# Altium PCB Soket_Board_PCB.PcbDoc
Units mm, origin at the board's own origin, x right, y up, seen from the top; angles counter-clockwise.
Board outline 118.49 x 86.99 mm, 2 copper layers (Top Layer, Bottom Layer), stack 1.569 mm thick; 15 components, 35 nets, 100 pads, 7 vias.
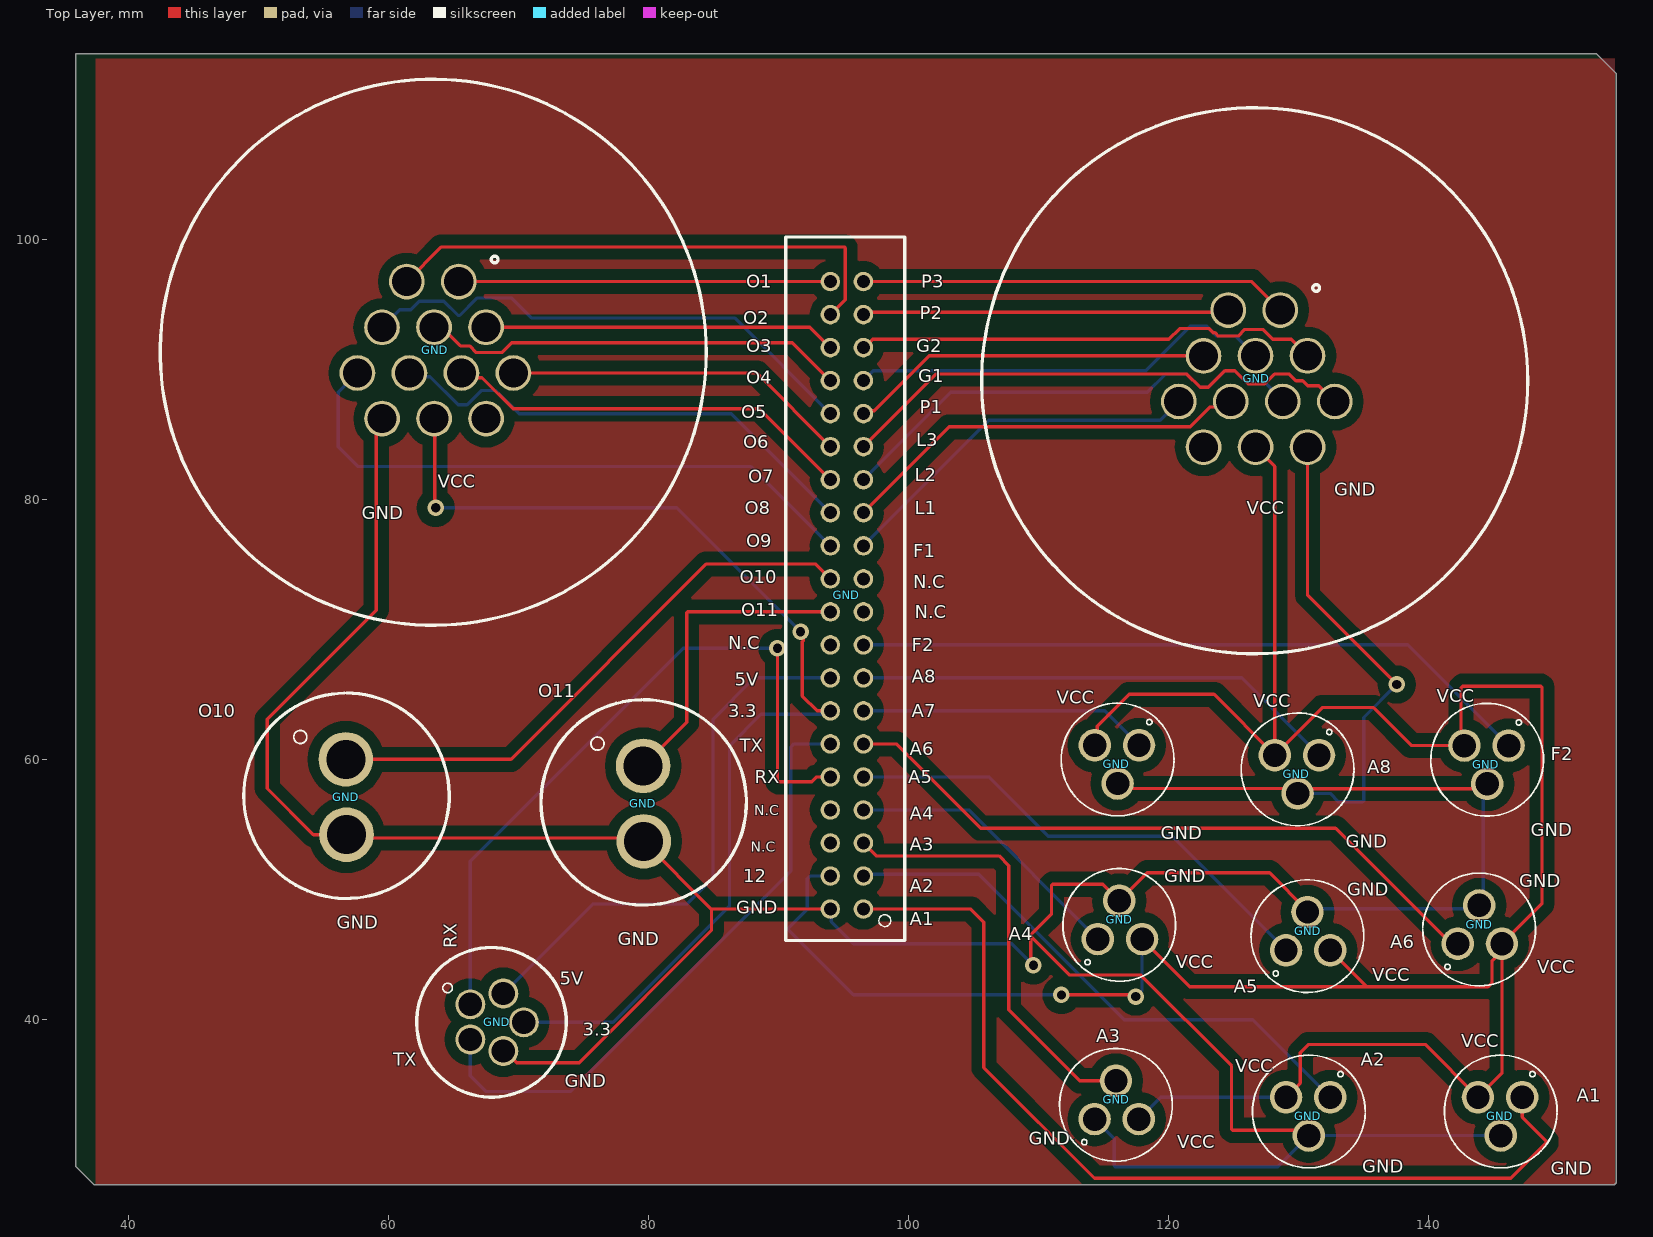
[diagram p0: Top Layer view]
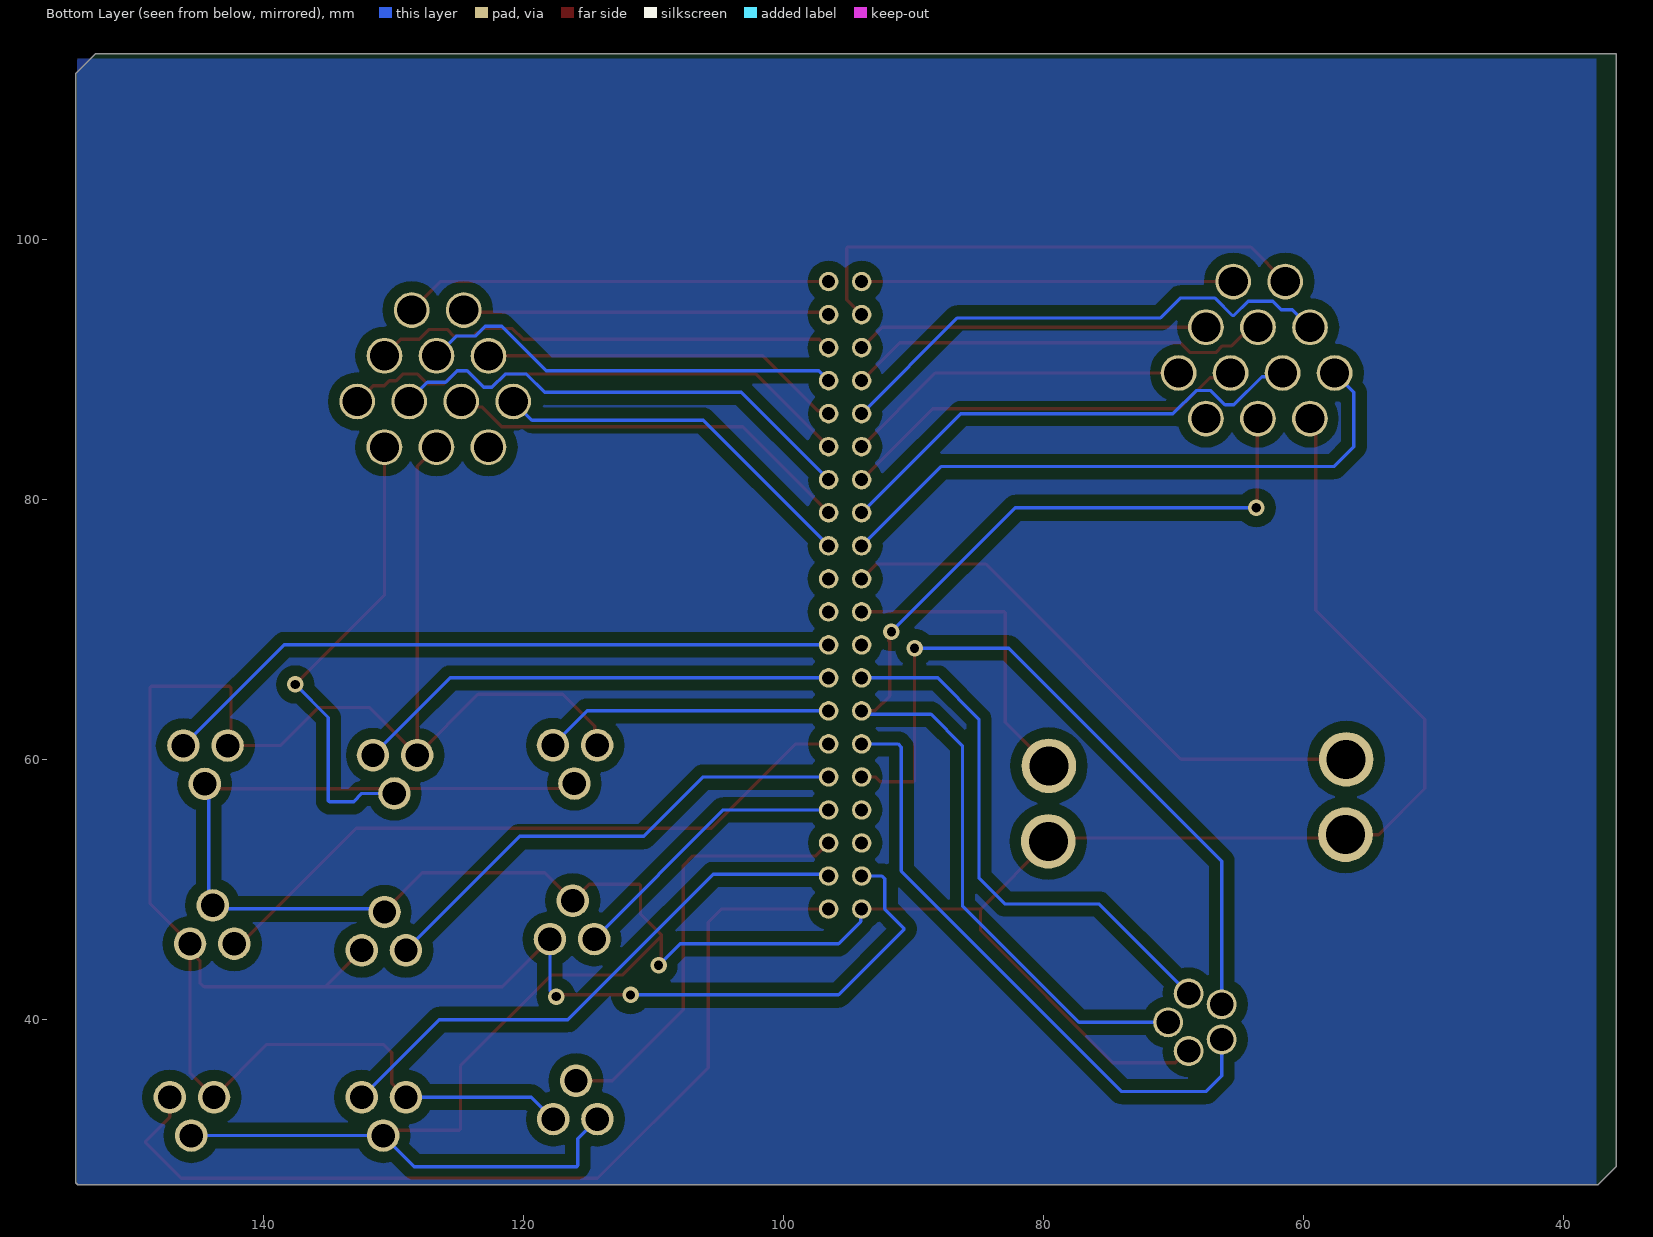
[diagram p1: Bottom Layer view, seen from below]

## Layer stack, top to bottom
Top Solder: solder mask 0.0254, SM-001, Dk 4
Top Layer: signal copper 0.035
Dielectric 1: core 1.4986, Core-043, Dk 4.3
Bottom Layer: signal copper 0.035
Bottom Solder: solder mask 0.0254, SM-001, Dk 4

## Board outline
35.941,28.702 37.338,27.305 154.283,27.305 154.432,27.454 154.432,112.776 152.908,114.3 35.941,114.3

## Design rules (kind name [scope] priority, off if disabled: settings)
Clearance [InPolygon] p1: gap=0.85 ignorepadtopadclearanceinfootprint=FALSE
PlaneClearance [All] p1: clearance=0.5
PlaneConnect [All] p1: planeconnectstyle=Relief reliefexpansion=0.908 reliefentries=4 reliefconductorwidth=0.554 reliefairgap=0.554
PolygonConnect [All] p1: connectstyle=Relief reliefconductorwidth=0.854 reliefentries=4 polygonreliefangle="90 Angle" airgapwidth=0.854
RoutingVias [All] p1: holewidth=0.711 width=1.27 viastyle="Through Hole" minholewidth=0.711 minwidth=1.27 maxholewidth=0.711 maxwidth=1.27
SolderMaskExpansion [All] p1: expansion=0.102 istentingtop=FALSE
Width [All] p1: maxlimit=0.654 minlimit=0.054 preferedwidth=0.14
28 further rules are at their usual default settings.

## Classes and differential pairs
component class Sheet2: *2 *3 *5 *7 *11 *12 *13 gnd

## Components (designator, comment, footprint, x,y, rotation, side; value= is the part's Value field where it differs from the comment)
GND "GND" PCBComponent_1 66.294,38.481 r90 top (schematic designator *15)
GND "GND" "circular canector 2 pin big" 56.769,54.229 r90 top (schematic designator *14)
GND "GND" "circular canector 2 pin big" 79.629,53.721 r90 top (schematic designator *13)
GND "GND" "BOX HEADER 2X20" 96.52,96.774 r270 top (schematic designator *12)
GND "GND" "calculator connector 12 pin big" 57.605,89.744 r0 top (schematic designator *11)
GND "GND" "calculator connector 12 pin big" 120.787,87.549 r0 top (schematic designator *10)
GND "GND" "circular connector 3 pin small" 143.793,34.036 r0 top (schematic designator *9)
GND "GND" "circular connector 3 pin small" 129.032,34.036 r0 top (schematic designator *8)
GND "GND" "circular connector 3 pin small" 117.704,32.36 r180 top (schematic designator *7)
GND "GND" "circular connector 3 pin small" 117.958,46.203 r180 top (schematic designator *6)
GND "GND" "circular connector 3 pin small" 132.432,45.339 r180 top (schematic designator *5)
GND "GND" "circular connector 3 pin small" 145.64,45.847 r180 top (schematic designator *4)
GND "GND" "circular connector 3 pin small" 114.325,61.112 r0 top (schematic designator *3)
GND "GND" "circular connector 3 pin small" 128.168,60.35 r0 top (schematic designator *2)
GND "GND" "circular connector 3 pin small" 142.748,61.087 r0 top (schematic designator *1)

## Footprints (in the part's own frame and the unit in brackets; to place one, negate y for a bottom-side part, rotate by r counter-clockwise, add the part's x,y. Pads: shape width x height; smd on the part's side, far side on the other; paste and mask are expansions set on the pad)
"BOX HEADER 2X20" [mm] "THIS IS MALE HEADER BOX 2X20 PIN"
  round 1.5 hole 1: 1(48.26,0) 2(45.72,0) 3(43.18,0) 4(40.64,0) 5(38.1,0) 6(35.56,0) 7(33.02,0) 8(30.48,0) 9(27.94,0) 10(25.4,0) 11(22.86,0) 12(20.32,0) 13(17.78,0) 14(15.24,0) 15(12.7,0) 16(10.16,0) 17(7.62,0) 18(5.08,0) 19(2.54,0) 20(0,0) 21(0,-2.54) 22(2.54,-2.54) 23(5.08,-2.54) 24(7.62,-2.54) 25(10.16,-2.54) 26(12.7,-2.54) 27(15.24,-2.54) 28(17.78,-2.54) 29(20.32,-2.54) 30(22.86,-2.54) 31(25.4,-2.54) 32(27.94,-2.54) 33(30.48,-2.54) 34(33.02,-2.54) 35(35.56,-2.54) 36(38.1,-2.54) 37(40.64,-2.54) 38(43.18,-2.54) 39(45.72,-2.54) 40(48.26,-2.54)
  silkscreen extent -3.43,-5.97 50.67,3.18
"calculator connector 12 pin big" [mm] "this is calculator connector 12 pin big"
  round 2.75 hole 2.25: 1(7.8,7.03) 2(3.8,7.03) 3(9.895,3.52) 4(5.895,3.52) 5(1.895,3.51) 6(12,0) 7(8,0) 8(4,0) 9(0,0) 10(9.9,-3.51) 11(5.9,-3.51) 12(1.9,-3.51)
  silkscreen extent -15.16,-19.4 26.83,22.59
"circular canector 2 pin big" [mm] "this is sircular cunnector 2 pin big"
  round 4.2 hole 3: 1(5.8,0.051) 2(0,0)
  silkscreen extent -4.9,-7.9 10.9,7.9
"circular connector 3 pin small" [mm] "this is the sircular cinnector 3 pin smal"
  round 2.5 hole 1.8: 1(3.4,0) 2(0,0) 3(1.753,-2.946)
  silkscreen extent -2.58,-5.42 6.09,3.24
PCBComponent_1 [mm]
  round 2.3 hole 1.8: 1(2.7,0) 2(0,0) 3(3.533,-2.54) 4(1.321,-4.115) 5(-0.889,-2.54)
  silkscreen extent -4.43,-7.38 7.08,4.13

## Part data
GND GND GND GND GND GND GND GND GND GND GND GND GND GND: library part "calcular connector?"
GND: library part BOX?

## Via types
v1: diameter 1.27, hole 0.711, Top Layer to Bottom Layer, 7 vias

## Nets (pads, with @x,y where several pads share a name; then routed paths per layer and width w, separated by ;. In a path a pad name is that pad's centre, name@x,y a point inside that pad or via, vN(x,y) a via of type N, cw(c..) or ccw(c..) an arc to the next point about the centre after c; other vN are vias at no path point)
3.3V: GND.4@70.409,39.802 GND.11@63.505,86.234 GND.34 | length 87.3
  Top Layer w0.254: GND.11@63.505,86.234 63.566,86.173 63.566,79.436 v1(63.627,79.375) ; v1(91.694,69.85) 91.89,69.654 91.89,69.157 91.821,69.088 91.821,64.897 92.964,63.754 GND.34
  Bottom Layer w0.254: v1(63.627,79.375) 82.169,79.375 v1(91.694,69.85) ; GND.4@70.409,39.802 77.267,39.802 86.233,48.768 86.233,61.087 88.646,63.5 93.726,63.5 GND.34
5V: GND.3@68.834,42.014 GND.33 | length 42.3
  Bottom Layer w0.254: GND.3@68.834,42.014 75.715,48.895 82.931,48.895 84.963,50.927 84.963,63.119 88.138,66.294 GND.33
A1: GND.1@96.52,48.514 GND.1@147.193,34.036 | length 73
  Top Layer w0.254: GND.1@96.52,48.514 104.775,48.514 105.791,47.498 105.791,36.322 114.3,27.813 146.304,27.813 149.04,30.549 149.04,30.665 147.193,32.512 GND.1@147.193,34.036
A2: GND.1@132.432,34.036 GND.2@96.52,51.054 | length 43.1
  Bottom Layer w0.254: GND.2@96.52,51.054 96.647,51.181 105.41,51.181 116.586,40.005 126.463,40.005 GND.1@132.432,34.036
A3: GND.3@96.52,53.594 GND.3@115.951,35.306 | length 33.5
  Top Layer w0.254: GND.3@96.52,53.594 97.517,52.597 106.96,52.597 107.696,51.861 107.696,40.767 113.157,35.306 GND.3@115.951,35.306
A4: GND.1@114.558,46.203 GND.4@96.52,56.134 | length 22.2
  Bottom Layer w0.254: GND.4@96.52,56.134 104.626,56.134 GND.1@114.558,46.203
A5: GND.1@129.032,45.339 GND.5@96.52,58.674 | length 38
  Bottom Layer w0.254: GND.5@96.52,58.674 106.172,58.674 110.744,54.102 120.269,54.102 GND.1@129.032,45.339
A6: GND.1@142.24,45.847 GND.6@96.52,61.214 | length 52.1
  Top Layer w0.254: GND.6@96.52,61.214 99.06,61.214 105.537,54.737 132.842,54.737 141.732,45.847 GND.1@142.24,45.847
A7: GND.1@117.725,61.112 GND.7@96.52,63.754 | length 22.3
  Bottom Layer w0.254: GND.7@96.52,63.754 115.084,63.754 GND.1@117.725,61.112
A8: GND.1@131.568,60.35 GND.8@96.52,66.294 | length 37.5
  Bottom Layer w0.254: GND.8@96.52,66.294 125.625,66.294 GND.1@131.568,60.35
F1: GND.9@120.787,87.549 GND.12@96.52,76.454 | length 28.9
  Bottom Layer w0.254: GND.12@96.52,76.454 106.172,86.106 119.344,86.106 GND.9@120.787,87.549
F2: GND.1@146.148,61.087 GND.9@96.52,68.834 | length 52.8
  Bottom Layer w0.254: GND.9@96.52,68.834 138.401,68.834 GND.1@146.148,61.087
G1: GND.4@126.682,91.069 GND.17 | length 32.8
  Bottom Layer w0.254: GND.17 97.282,89.916 118.237,89.916 121.666,93.345 122.936,93.345 123.698,92.583 125.168,92.583 GND.4@126.682,91.069
G2: GND.3@130.682,91.069 GND.18 | length 36.1
  Top Layer w0.254: GND.18 96.608,91.694 97.243,92.329 120.015,92.329 120.846,93.16 123.121,93.16 123.444,92.837 123.571,92.837 123.825,92.583 125.349,92.583 125.857,93.091 127.254,93.091 128.016,92.329 129.422,92.329 GND.3@130.682,91.069
GND: GND.1@114.304,32.36 GND.2@56.769,54.229 GND.2@79.629,53.721 GND.3@116.078,58.166 GND.3@116.205,49.149 GND.3@129.921,57.404 GND.3@130.679,48.285 GND.3@130.785,31.09 GND.3@143.887,48.793 GND.3@144.501,58.141 GND.3@145.546,31.09 GND.5@68.834,37.592 GND.10@130.687,84.039 GND.12@59.505,86.234 GND.40 | length 302.8
  Top Layer w0.254: GND.12@59.505,86.234 59.055,85.784 59.055,71.501 50.673,63.119 50.673,57.785 54.229,54.229 56.769,54.229 57.023,53.975 79.375,53.975 79.629,53.721 84.836,48.514 ; GND.5@68.834,37.592 68.979,37.592 69.868,36.703 74.676,36.703 84.836,46.863 84.836,48.514 ; GND.40 84.836,48.514 ; v1(109.601,44.196) 109.405,44.392 109.405,46.424 ; GND.3@116.078,58.166 116.459,57.785 129.54,57.785 129.921,57.404 130.289,57.772 144.132,57.772 GND.3@144.501,58.141 ; GND.3@130.679,48.285 130.679,48.391 127.762,51.308 118.364,51.308 116.205,49.149 114.935,50.419 111.08,50.419 110.998,50.337 110.998,48.133 109.405,46.54 109.405,46.424 ; GND.10@130.687,84.039 130.687,72.64 v1(137.541,65.786) ; GND.3@130.785,31.09 130.378,31.496 124.923,31.496 124.841,31.578 124.841,36.449 117.856,43.434 112.395,43.434 109.405,46.424
  Bottom Layer w0.254: GND.40 94.051,48.443 94.051,47.554 95.758,45.847 107.95,45.847 v1(109.601,44.196) ; GND.1@114.304,32.36 115.824,30.839 115.824,28.784 115.906,28.702 128.397,28.702 130.785,31.09 GND.3@145.546,31.09 ; GND.3@129.921,57.404 132.422,57.404 133.057,56.769 134.919,56.769 135.001,56.851 135.001,63.246 v1(137.541,65.786) ; GND.3@130.679,48.285 130.933,48.539 143.633,48.539 143.887,48.793 144.194,49.1 144.194,57.834 GND.3@144.501,58.141
L1: GND.8@124.787,87.549 GND.13 | length 31.8
  Top Layer w0.254: GND.13 103.124,85.598 121.666,85.598 123.202,87.134 124.372,87.134 GND.8@124.787,87.549
L2: GND.7@128.787,87.549 GND.14 | length 37.6
  Bottom Layer w0.254: GND.14 103.251,88.265 118.364,88.265 119.761,89.662 121.412,89.662 122.428,88.646 123.063,88.646 124.333,89.916 125.095,89.916 125.984,89.027 127.381,89.027 128.787,87.621 GND.7@128.787,87.549
L3: GND.6@132.787,87.549 GND.15 | length 41.1
  Top Layer w0.254: GND.15 102.108,89.662 121.412,89.662 122.428,88.646 123.063,88.646 124.333,89.916 125.095,89.916 126.111,88.9 127.381,88.9 128.143,89.662 129.286,89.662 129.794,89.154 130.302,89.154 130.683,88.773 131.563,88.773 GND.6@132.787,87.549
O1: GND.1@65.405,96.774 GND.21 | length 28.6
  Top Layer w0.254: GND.1@65.405,96.774 GND.21
O2: GND.2@61.405,96.774 GND.22 | length 40.5
  Top Layer w0.254: GND.2@61.405,96.774 64.072,99.441 95.041,99.441 95.123,99.359 95.123,95.377 GND.22
O3: GND.3@67.5,93.264 GND.23 | length 27.1
  Top Layer w0.254: GND.3@67.5,93.264 92.41,93.264 GND.23
O4: GND.4@63.5,93.264 GND.24 | length 32.8
  Top Layer w0.254: GND.4@63.5,93.264 64.089,93.264 65.532,91.821 66.231,91.821 66.739,91.313 68.707,91.313 69.469,92.075 91.059,92.075 GND.24
O5: GND.5@59.5,93.254 GND.25 | length 40
  Bottom Layer w0.254: GND.5@59.5,93.254 60.861,94.615 61.722,94.615 62.357,95.25 64.262,95.25 65.347,94.165 65.463,94.165 66.802,95.504 69.469,95.504 70.993,93.98 86.614,93.98 GND.25
O6: GND.6@69.605,89.744 GND.26 | length 26.7
  Top Layer w0.254: GND.6@69.605,89.744 88.31,89.744 GND.26
O7: GND.7@65.605,89.744 GND.27 | length 31.8
  Top Layer w0.254: GND.7@65.605,89.744 65.962,89.387 67.19,89.387 69.582,86.995 88.519,86.995 GND.27
O8: GND.8@61.605,89.744 GND.28 | length 37.7
  Bottom Layer w0.254: GND.8@61.605,89.744 61.885,89.464 63.19,89.464 65.347,87.307 66.04,87.307 67.125,88.392 68.263,88.392 70.041,86.614 86.36,86.614 GND.28
O9: GND.9@57.605,89.744 GND.29 | length 47.3
  Bottom Layer w0.254: GND.9@57.605,89.744 56.134,88.273 56.134,84.074 57.658,82.55 87.884,82.55 GND.29
O10: GND.1@56.718,60.029 GND.30 | length 44
  Top Layer w0.254: GND.1@56.718,60.029 69.427,60.029 84.455,75.057 92.837,75.057 GND.30
O11: GND.1@79.578,59.521 GND.31 | length 24.2
  Top Layer w0.254: GND.1@79.578,59.521 82.931,62.874 82.931,71.292 83.013,71.374 GND.31
P1: GND.5@122.682,91.059 GND.16 | length 28
  Top Layer w0.254: GND.16 96.741,86.835 97.376,86.835 101.6,91.059 GND.5@122.682,91.059
P2: GND.2@124.587,94.579 GND.19 | length 28.2
  Top Layer w0.254: GND.19 96.692,94.406 124.414,94.406 GND.2@124.587,94.579
P3: GND.1@128.587,94.579 GND.20 | length 33
  Top Layer w0.254: GND.20 126.392,96.774 GND.1@128.587,94.579
RX_LCD: GND.1@66.294,41.181 GND.36 | length 55.9
  Top Layer w0.254: v1(89.916,68.58) 89.916,58.375 89.998,58.293 92.567,58.293 92.948,58.674 GND.36
  Bottom Layer w0.254: GND.1@66.294,41.181 66.294,52.197 82.677,68.58 v1(89.916,68.58)
TX_LCD: GND.2@66.294,38.481 GND.35 | length 47.6
  Bottom Layer w0.254: GND.2@66.294,38.481 66.294,35.687 67.506,34.475 73.972,34.475 90.932,51.435 90.932,60.96 91.186,61.214 GND.35
VCC: GND.2@114.325,61.112 GND.2@117.704,32.36 GND.2@117.958,46.203 GND.2@128.168,60.35 GND.2@129.032,34.036 GND.2@132.432,45.339 GND.2@142.748,61.087 GND.2@143.793,34.036 GND.2@145.64,45.847 GND.11@126.687,84.039 GND.39 | length 210.9
  Top Layer w0.254: v1(111.76,41.91) 117.348,41.91 v1(117.475,41.783) ; GND.2@114.325,61.112 114.515,61.302 114.515,62.572 116.967,65.024 123.495,65.024 GND.2@128.168,60.35 ; GND.2@117.958,46.203 121.615,42.545 135.226,42.545 ; GND.11@126.687,84.039 128.168,82.558 GND.2@128.168,60.35 ; GND.2@129.032,34.036 130.124,35.128 130.124,37.459 130.765,38.1 139.729,38.1 143.793,34.036 145.64,35.883 GND.2@145.64,45.303 ; GND.2@132.432,45.339 135.226,42.545 ; GND.2@128.168,60.35 131.826,64.008 135.763,64.008 138.684,61.087 142.748,61.087 142.494,61.341 142.494,65.532 142.621,65.659 148.635,65.659 148.717,65.577 148.717,48.924 145.64,45.847 GND.2@145.64,45.303 ; 135.226,42.545 144.571,42.545 144.88,42.854 144.88,44.543 GND.2@145.64,45.303
  Bottom Layer w0.254: GND.39 92.411,51.054 92.202,50.845 92.202,48.514 90.736,47.048 90.736,46.932 95.758,41.91 v1(111.76,41.91) ; v1(117.475,41.783) 117.958,42.266 GND.2@117.958,46.203 ; GND.2@117.704,32.36 119.38,34.036 GND.2@129.032,34.036
pads on no net: GND.10@67.505,86.234 GND.10@96.52,71.374 GND.11@96.52,73.914 GND.12@122.687,84.039 GND.32 GND.37 GND.38

## Polygon pours and split planes (outlines as drawn)
no net on Bottom Layer "NONET_L02_P002" (solid, pour order 2): 154.305,27.305 37.465,27.305 37.465,113.919 154.432,113.919 154.305,113.792
no net on Top Layer "NONET_L01_P003" (solid, pour order 3): 154.305,27.305 37.465,27.305 37.465,113.919 154.305,113.919

## Silkscreen, mask and mechanical layers (free items; w line width, h text height)
Top Overlay:
  text "O1" at 87.526,96.289 h1
  text "P3" at 100.988,96.289 h1
  text "P2" at 100.861,93.876 h1
  text "O2" at 87.272,93.495 h1
  text "O3" at 87.526,91.336 h1
  text "G2" at 100.607,91.336 h1
  text "G1" at 100.734,89.05 h1
  text "O4" at 87.526,88.923 h1
  text "P1" at 100.861,86.637 h1
  text "O5" at 87.145,86.256 h1
  text "L3" at 100.607,84.097 h1
  text "O6" at 87.272,83.97 h1
  text "L2" at 100.48,81.43 h1
  text "O7" at 87.653,81.303 h1
  text "VCC" at 63.777,80.922 h1
  text "GND" at 132.738,80.287 h1
  text "O8" at 87.399,78.89 h1
  text "L1" at 100.48,78.89 h1
  text "VCC" at 126.007,78.89 h1
  text "GND" at 57.935,78.509 h1
  text "O9" at 87.526,76.35 h1
  text "F1" at 100.353,75.588 h1
  text "O10" at 87.018,73.556 h1
  text "N.C" at 100.353,73.175 h1
  text "O11" at 87.145,71.016 h1
  text "N.C" at 100.484,70.893 h1
  text "N.C" at 86.129,68.476 h1
  text "F2" at 100.226,68.349 h1
  text "A8" at 100.226,65.936 h1
  text "5V" at 86.637,65.682 h1
  text "O11" at 71.524,64.793 h1
  text "VCC" at 140.612,64.412 h1
  text "VCC" at 111.402,64.285 h1
  text "VCC" at 126.515,64.031 h1
  text "O10" at 45.362,63.269 h1
  text "3.3" at 86.129,63.269 h1
  text "A7" at 100.226,63.269 h1
  text "TX" at 87.018,60.602 h1
  text "A6" at 100.099,60.348 h1
  text "F2" at 149.375,59.967 h1
  text "A8" at 135.278,58.951 h1
  text "RX" at 88.161,58.189 h1
  text "A5" at 99.972,58.189 h1
  text "N.C" at 88.111,55.726 h0.8
  text "A4" at 100.099,55.395 h1
  text "GND" at 147.851,54.125 h1
  text "GND" at 119.403,53.871 h1
  text "GND" at 133.627,53.236 h1
  text "A3" at 100.099,52.982 h1
  text "N.C" at 87.857,52.932 h0.8
  text "12" at 87.272,50.569 h1
  text "GND" at 119.657,50.569 h1
  text "GND" at 146.962,50.188 h1
  text "A2" at 100.099,49.807 h1
  text "GND" at 133.754,49.553 h1
  text "GND" at 86.764,48.156 h1
  text "A1" at 100.099,47.267 h1
  text "GND" at 56.03,47.013 h1
  text "A4" at 107.719,46.124 h1
  text "GND" at 77.62,45.743 h1
  text "RX" at 65.255,45.489 h1 r90
  text "A6" at 137.056,45.489 h1
  text "VCC" at 120.546,43.965 h1
  text "VCC" at 148.359,43.584 h1
  text "VCC" at 135.659,42.949 h1
  text "5V" at 73.175,42.695 h1
  text "A5" at 124.991,42.06 h1
  text "3.3" at 74.953,38.758 h1
  text "A3" at 114.45,38.25 h1
  text "VCC" at 142.517,37.869 h1
  text "TX" at 60.348,36.472 h1
  text "A2" at 134.77,36.472 h1
  text "VCC" at 125.118,35.964 h1
  text "GND" at 73.556,34.821 h1
  text "A1" at 151.407,33.678 h1
  text "GND" at 109.243,30.376 h1
  text "VCC" at 120.673,30.122 h1
  text "GND" at 134.897,28.217 h1
  text "GND" at 149.375,28.09 h1